# Altium PCB PCB1.PcbDoc
Units mil, origin at the board's own origin, x right, y up, seen from the top; angles counter-clockwise.
Board outline 6000 x 4000 mil, 2 copper layers (Top Layer, Bottom Layer); 25 components, 10 nets, 66 pads, 0 vias.
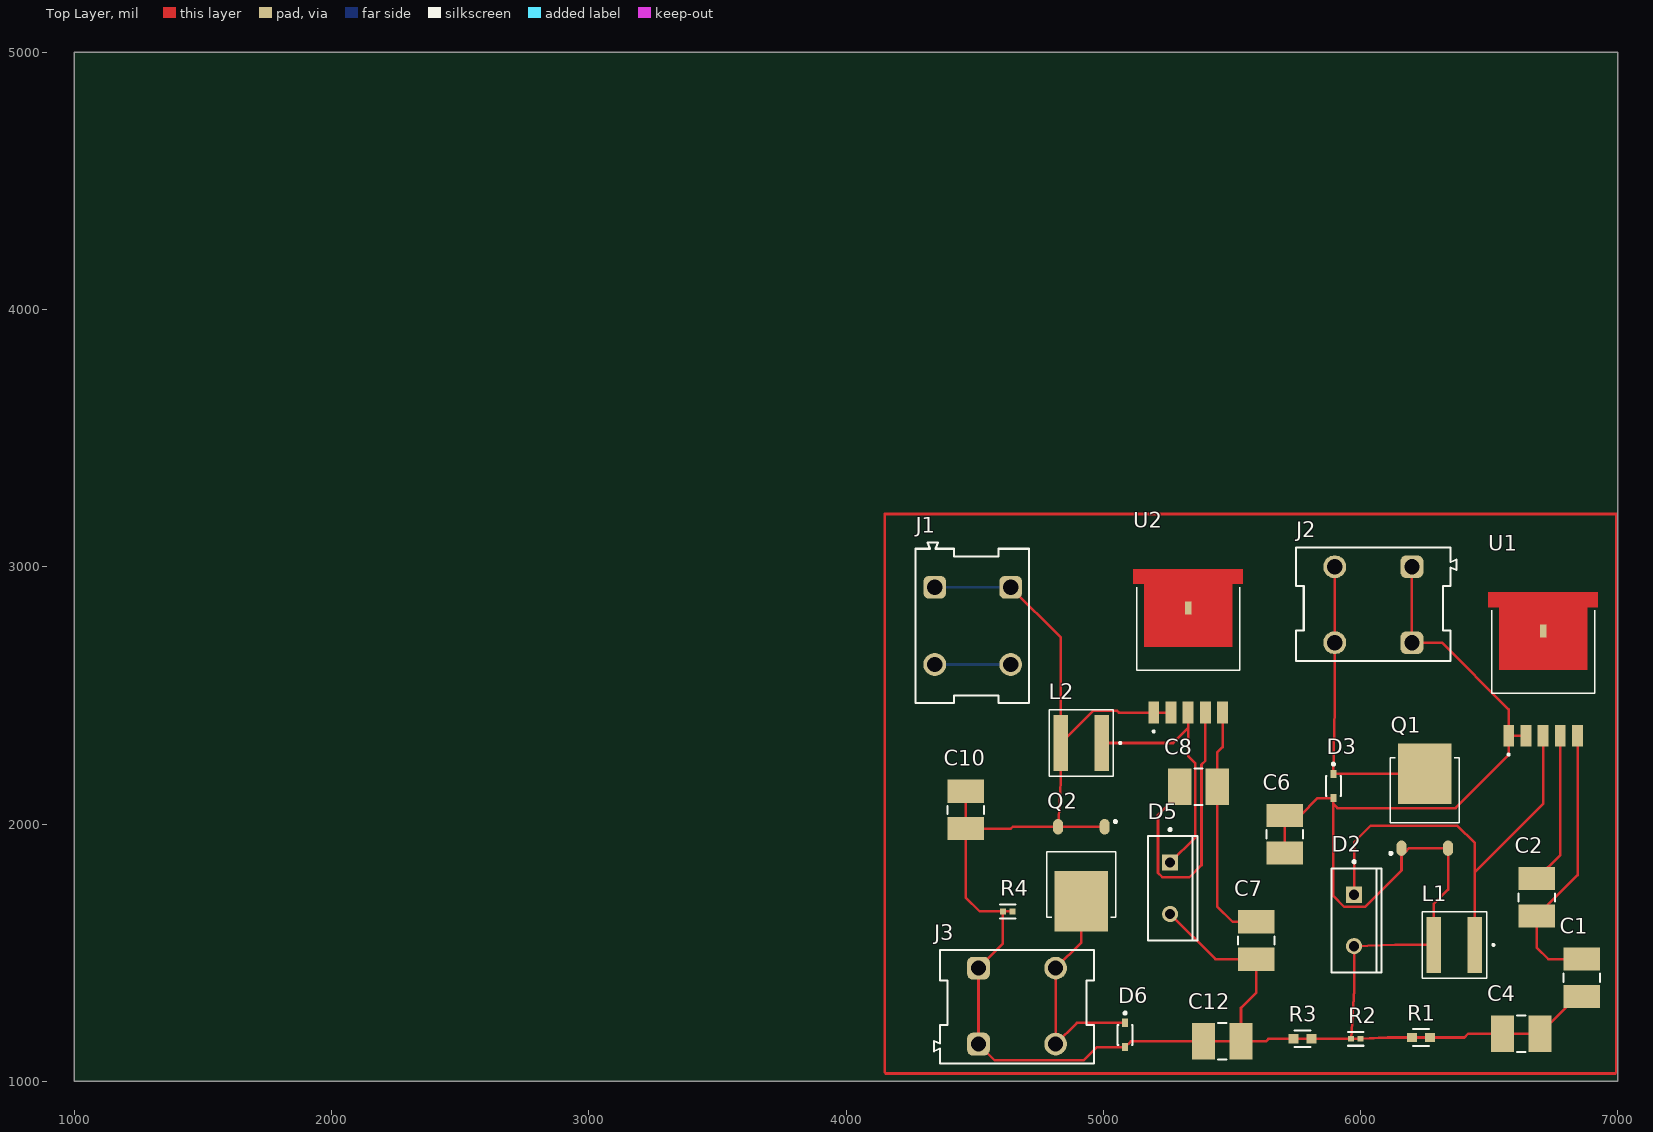
[diagram p0: Top Layer view]
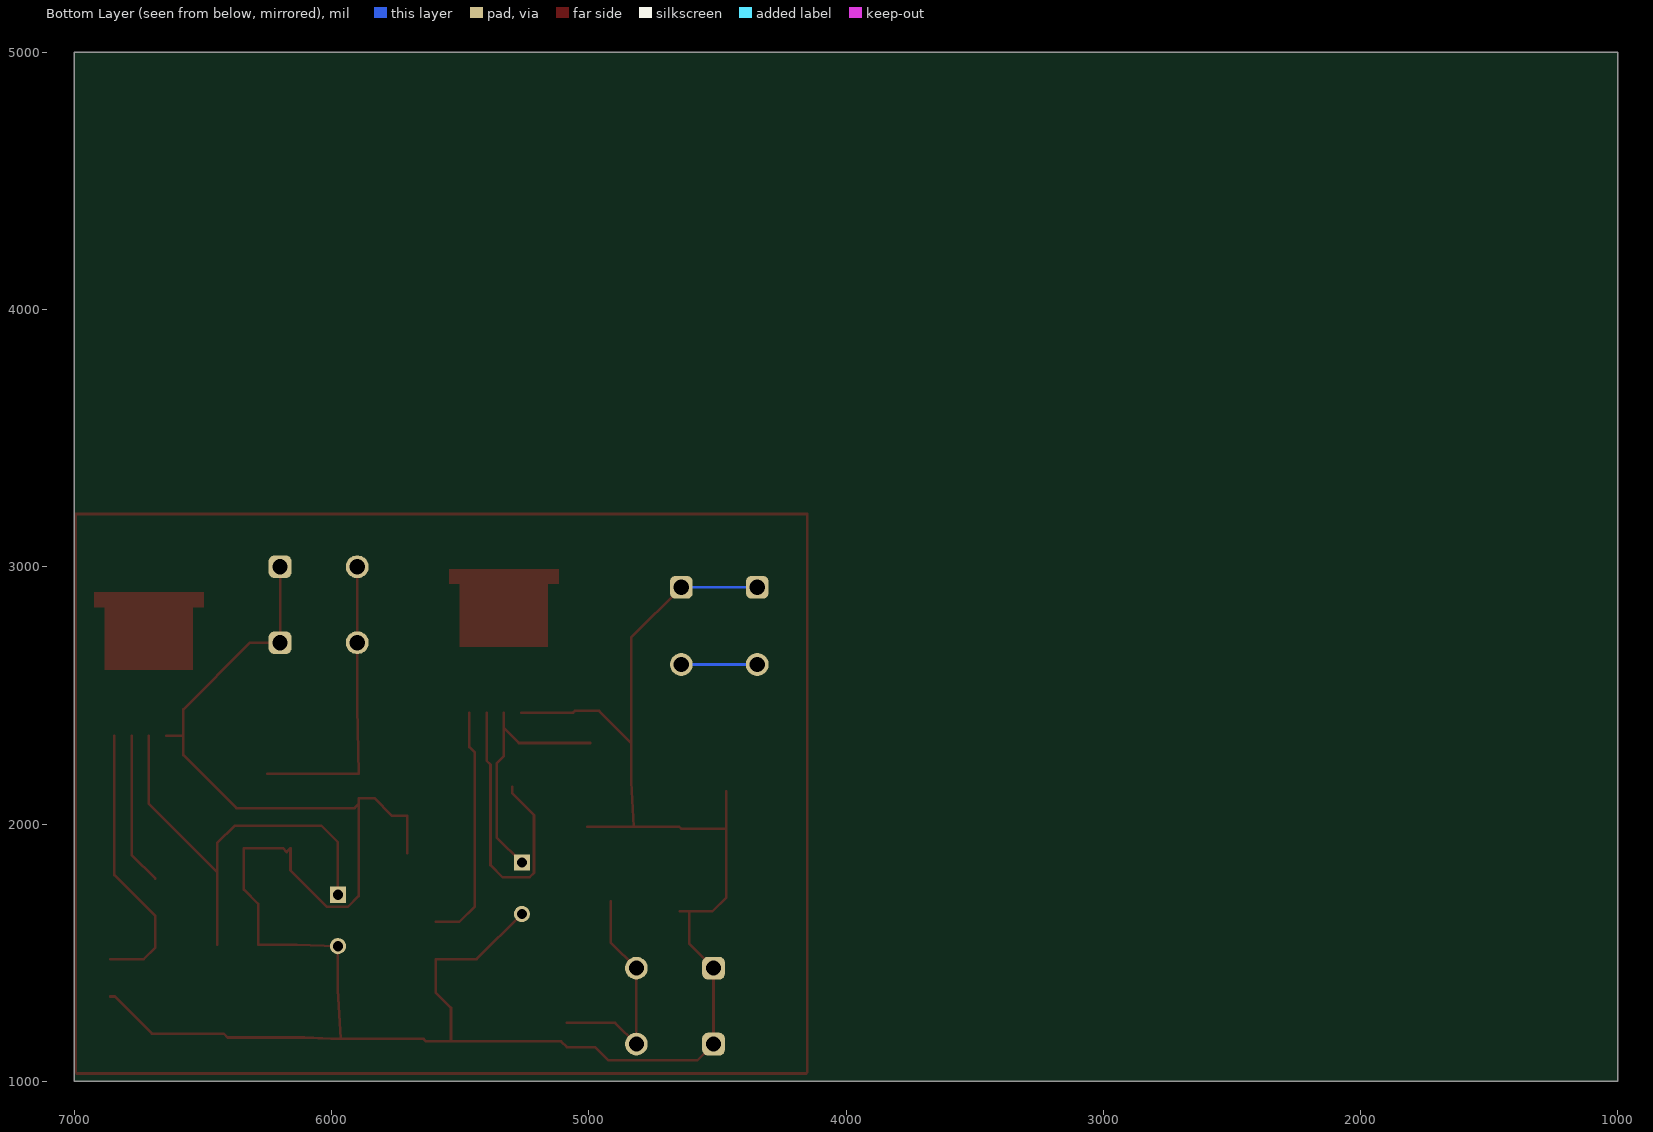
[diagram p1: Bottom Layer view, seen from below]
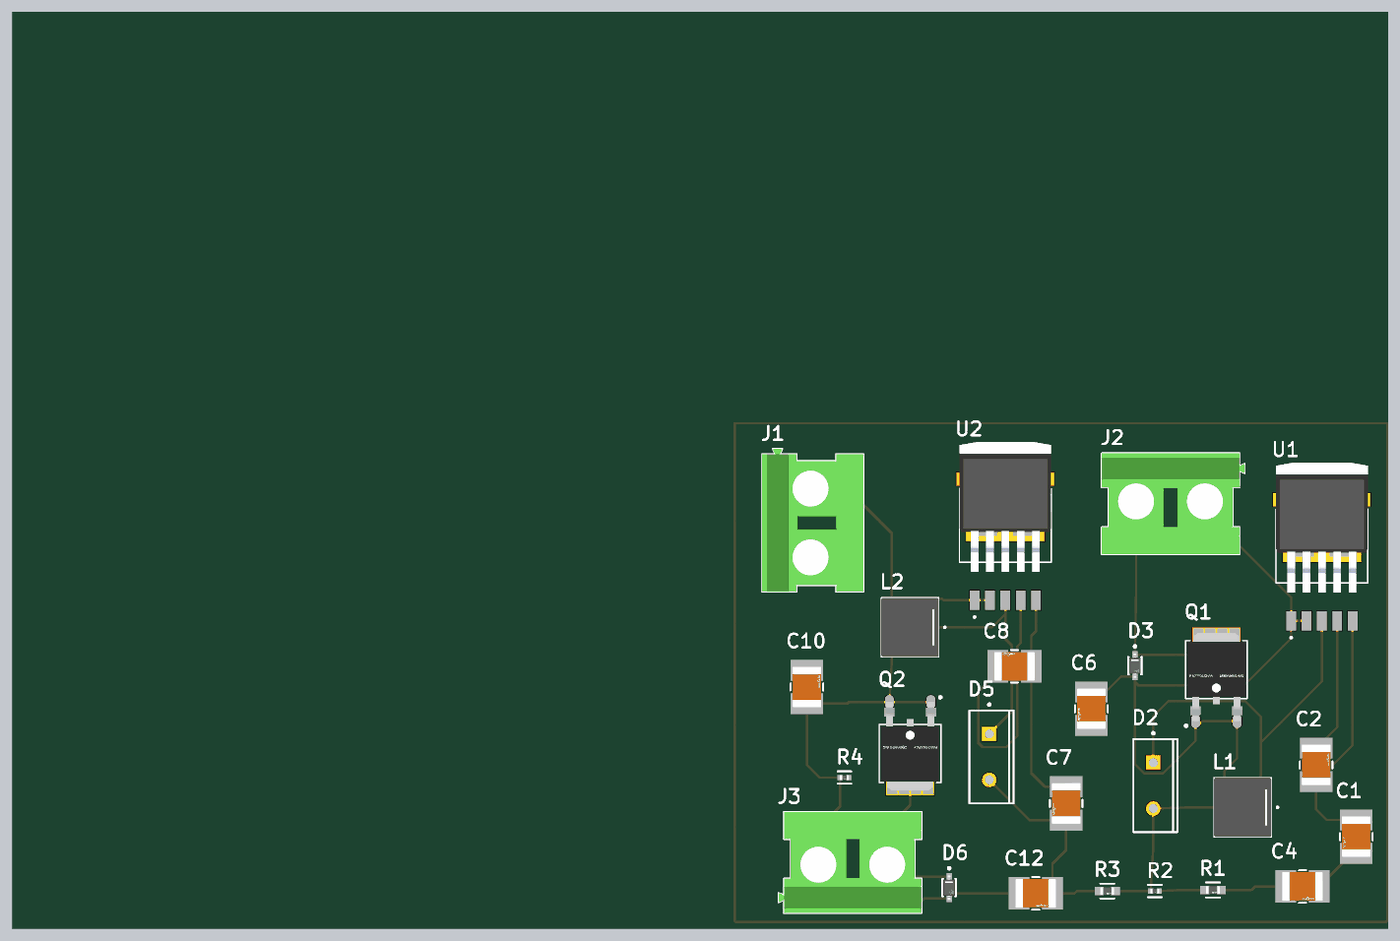
[diagram p2: 3D render of the assembled board from above, using the file's embedded part models]

## Layer stack, top to bottom
Top Solder: solder mask 0.4, Solder Resist, Dk 3.5
Top Layer: signal copper 1.4
Dielectric 1: dielectric 12.6, FR-4, Dk 4.8
Bottom Layer: signal copper 1.4
Bottom Solder: solder mask 0.4, Solder Resist, Dk 3.5

## Board outline
1000,1000 7000,1000 7000,5000 1000,5000

## Design rules (kind name [scope] priority, off if disabled: settings)
Clearance [All] p1: gap=10 ignorepadtopadclearanceinfootprint=FALSE
PolygonConnect [All] p1: connectstyle=Relief reliefconductorwidth=10 reliefentries=4 polygonreliefangle="90 Angle" airgapwidth=10
RoutingVias [All] p1: holewidth=28 width=50 viastyle="Through Hole" minholewidth=28 minwidth=50 maxholewidth=28 maxwidth=50
SolderMaskExpansion [All] p1: expansion=4 istentingtop=FALSE
SupplyNets "Schematic Supply Nets" [InNet('-12v')] p1: voltage=0.000
Width [All] p1: maxlimit=80 minlimit=10 preferedwidth=10 minimp=50.000000 maximp=50.000000 favimp=50.000000
30 further rules are at their usual default settings.

## Components (designator, comment, footprint, x,y, rotation, side; value= is the part's Value field where it differs from the comment)
C1 "220uf" FP-GRM43D-0_4-IPC_A 6860,1402.15 r270 top value=GRM43DR72J104KW01L
C2 "100uf" FP-GRM43D-0_4-IPC_A 6685,1715 r90 top value=GRM43DR72J104KW01L
C4 "capacitor" FP-GRM43D-0_4-IPC_A 6625,1185 r0 top value=GRM43DR72J104KW01L
C6 "capacitor" FP-GRM43D-0_4-IPC_A 5705,1960 r270 top value=GRM43DR72J104KW01L
C7 "220uf" FP-GRM43D-0_4-IPC_A 5595,1547.15 r270 top value=GRM43DR72J104KW01L
C8 "100uf" FP-GRM43D-0_4-IPC_A 5370,2145 r180 top value=GRM43DR72J104KW01L
C10 "capacitor" FP-GRM43D-0_4-IPC_A 4465,2055 r90 top value=GRM43DR72J104KW01L
C12 "capacitor" FP-GRM43D-0_4-IPC_A 5462.85,1155 r0 top value=GRM43DR72J104KW01L
D2 "schottky" ONSC-TO-220-2-221B-04_E 5975,1625 r0 top value=MBR1045G
D3 "BZX384C36-G3-08" FP-S8-V-3910_02-001-MFG 5895,2147.76 r270 top
D5 "schottky" ONSC-TO-220-2-221B-04_E 5260,1750 r0 top value=MBR1045G
D6 "BZX384C36-G3-08" FP-S8-V-3910_02-001-MFG 5085,1180 r270 top
J1 "691254410002" 691254410002 4490.67,2770 r270 top
J2 "691254410002" 691254410002 6050,2854.33 r180 top
J3 "691254410002" 691254410002 4665,1290 r0 top
L1 "inductor" IND_XAL6060-223MEC 6365,1530 r180 top value=XAL6060-223MEC
L2 "inductor" IND_XAL6060-223MEC 4914.53,2315 r180 top value=XAL6060-223MEC
Q1 "NP20P06SLG-E1-AY" DPAK230P1010X240-3_PRSS0004ZV-A_N 6250,2095 r90 top
Q2 "NP20P06SLG-E1-AY" DPAK230P1010X240-3_PRSS0004ZV-A_N 4915,1800.39 r270 top
R1 "18.4k" FP-RN731J-MFG 6235.43,1170 r0 top value=10KΩ
R2 "3.3k" FP-RN73R1E-IPC_B 5981.73,1165 r0 top value=RN73R1ETTP3301F25
R3 "10k" FP-RN731J-MFG 5774.57,1165 r0 top value=10KΩ
R4 "3.3k" FP-RN73R1E-IPC_B 4628.27,1660 r0 top value=RN73R1ETTP3301F25
U1 "XL4015" CONV_XL4015 6710,2750 r90 top
U2 "XL4015" CONV_XL4015 5330,2840 r90 top

## Footprints (in the part's own frame and the unit in brackets; to place one, negate y for a bottom-side part, rotate by r counter-clockwise, add the part's x,y. Pads: shape width x height; smd on the part's side, far side on the other; paste and mask are expansions set on the pad)
691254410002 [mm] "Serie 2544 - 7.62 mm _ 2 pins"
  rrect50% 2.25x2.25 hole 1.5: 1(-3.81,3.8) 1(-3.81,-3.7)
  round 2.25 hole 1.5: 2(3.81,3.8) 2(3.81,-3.7)
  silkscreen extent -8.22,-5.6 7.62,5.6, body extent -8.22,-5.6 7.62,5.6, height 18.05
CONV_XL4015 [mm]
  rect 2.16x1.07 smd: 1(-10.335,3.4) 2(-10.335,1.7) 3(-10.335,0) 4(-10.335,-1.7) 5(-10.335,-3.4)
  rect 1.27x0.635 smd paste-2 mask+0: 3.1(0,0)
  Top Layer region: 3.835,-5.4 2.365,-5.4 2.365,-4.35 -3.835,-4.35 -3.835,4.35 2.365,4.35 2.365,5.4 3.835,5.4
  silkscreen extent -12.3,-5.08 2.05,5.08, body extent -7.17,-5.08 7.17,5.08, height 4.7
DPAK230P1010X240-3_PRSS0004ZV-A_N [mm] "D-PAK, 3-Pads, Body 6.10x6.50mm (max), IPC Medium Density"
  rrect100% 1.525x1 smd: 1(-4.8,2.3) 3(-4.8,-2.3)
  rect 6x5.3 smd paste-3: 4(2.55,0)
  silkscreen extent -5.44,-3.41 4.11,3.47, body extent -4.81,-3.25 4.99,3.25, height 2.65
FP-GRM43D-0_4-IPC_A [mil]
  rect 90.64x141.9 smd paste+0 mask+0: 1(-72.85,0) 2(72.85,0)
  silkscreen extent -16,-71 16,71, body extent -138,-91 138,91, height 10
FP-RN73R1E-IPC_B [mil]
  rect 23.14x22.54 smd paste+0 mask+0: 1(-18.27,0) 2(18.27,0)
  silkscreen extent -30,-27 30,27, body extent -36,-17 36,17, height 10
FP-RN731J-MFG [mm]
  rect 1x0.9 smd paste+0 mask+0: 1(-0.9,0) 2(0.9,0)
  silkscreen extent -0.77,-0.82 0.77,0.82, body extent -1.5,-0.55 1.5,0.55, height 0.25
FP-S8-V-3910_02-001-MFG [mm]
  rect 0.8x0.6 smd paste+0 mask+0: 1(-1.2,0) 2(1.2,0)
  silkscreen extent -2.27,-0.75 0.98,0.75, body extent -1.7,-0.85 1.7,0.85, height 0.25
IND_XAL6060-223MEC [mm]
  rect 1.43x5.5 smd: 1(-2.02,0) 2(2.02,0)
  silkscreen extent -3.95,-3.28 3.18,3.28, body extent -3.18,-3.28 3.18,3.28, height 6.1
ONSC-TO-220-2-221B-04_E [mm] "FM, 2-Leads, Body 10.3x4.85mm, Pitch 5.08mm"
  rect 1.6x1.6 hole 1: 1(0,2.54)
  round 1.6 hole 1: 3(0,-2.54)
  silkscreen extent -2.2,-5.15 2.69,5.92, body extent -2.18,-5.15 2.67,5.15, height 19.05

## Part data
C1 C2 C4 C6 C7 C8 C10 C12: library part CMP-06035-043619-1, "Chip Multilayer Ceramic Capacitors for General Purpose, 1812, 0.10uF, X7R, 15%, 10%, 630V", Capacitance=100nF, Case Code (Imperial)=1812, Case Code (Metric)=4532, Dielectric=X7R, Max Operating Temperature=125°C, Min Operating Temperature=-55°C, Package Quantity=1, Tolerance=10%, Voltage=630V, Case/Package=1812, Depth=3.2mm, Height=2mm, Lead Free="Lead Free", Length=4.5mm, Mount="Surface Mount", Number of Pins=2, Packaging="Tape and Reel", Radiation Hardening=No, REACH SVHC="No SVHC", Termination=SMD/SMT, Thickness=0.087inch, Voltage Rating=630V, Voltage Rating (DC)=630V, Width=3.2mm
D2 D5: library part CMP-1055-00610-1, "SWITCHMODE(TM) Power Rectifier, 2-Pin TO-220, Pb-Free, Tube", Manufacturer="On Semiconductor", PartNumber=MBR1045G, ComponentLink1Description="Manufacturer URL", ComponentLink1URL=http://www.onsemi.com/, ComponentLink2Description=Datasheet, ComponentLink2URL=http://www.onsemi.cn/pub_link/Collateral/MBR1035-D.PDF, ComponentLink3Description="Package Specification", ComponentLink3URL=http://www.onsemi.com/pub_link/Collateral/BYW29-D.PDF, Configuration=Single, DatasheetVersion="Rev. 8", IFSM Max (A)=150, Mounting Technology="Through Hole", PackageDescription="2-Pin Flange Mount, Vertical Straight Lead, Body 9.97 x 4.44 mm, Pitch 5.08 mm", PackageReference=TO-220-2-221B-04_E, PackageVersion="Rev. E", Packing=Tube, RoHS=TRUE
D3 D6: library part CMP-00030-30650272-1, "BZX384C36-G3-08 Zener Diode Sod3235%, 36V, 0.2W", Case/Package=SOD-323-2, Max Junction Temperature (Tj)=150°C, Max Power Dissipation=200mW, Max Reverse Leakage Current=50nA, Min Operating Temperature=-55°C, Tolerance=5%, Zener Voltage=36V, Element Configuration=Single, Height=1.15mm, Impedance=90Ω, Max Operating Temperature=150°C, Mount="Surface Mount", NexarPartId=30650272, Power Dissipation=200mW, RoHS=Compliant, Voltage Tolerance=5%, Weight=3.997283mg
J1 J2 J3: library part CMP-1502-02748-2, NexarPartId=105950827
L1 L2: library part XAL6060-223MEC, "22 ÂµH Shielded Molded Inductor 5 A 60.63mOhm Max Nonstandard", Package=None, Check_prices=https://www.snapeda.com/parts/XAL6060-223MEC/Coilcraft/view-part/?ref=eda, MF=Coilcraft, MP=XAL6060-223MEC, SnapEDA_Link=https://www.snapeda.com/parts/XAL6060-223MEC/Coilcraft/view-part/?ref=snap
Q1 Q2: library part CMP-00572-18642678-1, "Mosfet, P -Ch, 60V, 20A, To-252 Rohs Compliant: Yes", Case/Package=TO-252, Continuous Drain Current (ID)=-20A, Drain to Source Voltage (Vdss)=-60V, Gate to Source Voltage (Vgs)=-20V, Input Capacitance=1.65nF, Manufacturer Lifecycle Status=ACTIVE, Max Junction Temperature (Tj)=175°C, Max Power Dissipation=1.2W, Min Operating Temperature=-55°C, China RoHS=Compliant, ComponentLink1Description="Manufacturer's Website", ComponentLink1URL=http://www.renesas.com, ComponentLink2Description="Datasheet URL", ComponentLink2URL=https://octopart.com/cad-content/api/get-model-datasheet/15189/18642678, ComponentLink3Description="Manufacturer's Package Drawing", ComponentLink3URL=https://www.renesas.com/en/document/psc/package-drawing-mp-3zk-3pin-prss0004zv, Export Control Classification Number (ECCN) Code=EAR99, Fall Time=80ns, Height=2.4mm, HelpURL=https://octopart.com/cad-content/api/get-model-datasheet/15189/18642678, Length=6mm, Lifecycle Status=Production, Max Operating Temperature=175°C, Mount="Surface Mount", Number of Elements=1, Number of Pins=3, Packaging="Tape and Reel", Power Dissipation=1.2W, Radiation Hardening=No, Rds On Max=48mΩ, Rise Time=8ns, RoHS=Compliant, Turn-Off Delay Time=160ns, Turn-On Delay Time=8ns, Width=6mm
R1 R3: library part CMP-03211-006130-1, "Thin Film Resistors RN 0603 10KΩ 0.1% 10ppm/°C", Manufacturer="TE Connectivity", Manufacturer Part Number=RN73C1J10KB, Package=RN731J, Power Rating=0.063W, Resistance=10KΩ, Temperature="-55°C to +155°C", Temperature Coefficient=10ppm/°C, Temperature Range High=+155°C, Temperature Range Low=-55°C, Tolerance=0.1%, Voltage Rating=50V, Automotive=No, Category=Res, ComponentLink2Description=Datasheet, ComponentLink2URL=https://www.te.com/commerce/DocumentDelivery/DDEController?Action=showdoc&DocId=Data+Sheet%7F1773270%7FP%7Fpdf%7FEnglish%7FENG_DS_1773270_P.pdf%7F9-1614352-9, Composition="Thin Film", Device Class L1="Passive Components", Device Class L2=Resistors, Device Class L3="Chip SMD Resistors", Height=0.55mm, Ipc Land Pattern Name=RESC15580X45, Lead Free=Yes, Octopart=https://octopart.com/rn73c1j10kb-te+connectivity-47108040, octopart_url=https://octopart.com/rn73c1j10kb-te+connectivity-47108040, RoHS=TRUE, Series=RN73
R2 R4: library part CMP-04015-026447-1, "3.3kΩ ±1% 0.063W, 1/16W Chip Resistor 0402 (1005 Metric) Moisture Resistant Thin Film"
U1 U2: "5A 180KHz 36V Buck DC to DC Converter", Package=None, Check_prices=https://www.snapeda.com/parts/XL4015/XLSEMI/view-part/?ref=eda, MF=XLSEMI, MP=XL4015, SnapEDA_Link=https://www.snapeda.com/parts/XL4015/XLSEMI/view-part/?ref=snap

## Nets (pads, with @x,y where several pads share a name; then routed paths per layer and width w, separated by ;. In a path a pad name is that pad's centre, name@x,y a point inside that pad or via, vN(x,y) a via of type N, cw(c..) or ccw(c..) an arc to the next point about the centre after c; other vN are vias at no path point)
+12v: J1.2 | length 295.3
  Bottom Layer w10: J1.2@4345,2620 J1.2@4640.28,2620
-12v: C1.2 C4.1 C4.2 C6.1 C6.2 C7.2 C10.1 C10.2 C12.1 C12.2 D2.3 D3.2 D5.3 D6.2 J1.1 J2.1 J3.1 L1.2 L2.2 Q1.1 Q1.3 Q2.1 Q2.3 R1.1 R1.2 R2.1 R2.2 R3.1 R3.2 R4.1 R4.2 U1.1 U1.2 U2.1 U2.2 | length 10959.4
  Top Layer w10: C10.2 C10.1 ; J1.1@4640.28,2920 4835,2725.28 L2.2 ; R4.2 R4.1 ; Q2.1 Q2.3 ; D5.3 5435.7,1474.3 C7.2 5595,1344.3 5535.7,1285 C12.2 ; U2.2 U2.1 5196.14,2433 5061,2433 5054,2440 4960,2440 L2.2 ; C6.2 C6.1 5766,2032.85 5833.66,2100.51 D3.2 5895,2077 ; J2.1@6200,3000 6200,2704.72 6317.42,2704.72 6576.14,2446 U1.1 ; U1.2 U1.1 ; C1.2 6842.15,1329.3 C4.2 C4.1 6419,1185 6404,1170 R1.2 R1.1 6105,1170 R2.2 R2.1 ; C10.1 4465,1715 4520,1660 R4.1 ; C10.1 4641,1982.15 4648.22,1989.37 Q2.3 ; R4.1 4610,1534.61 4515,1439.61 4515,1144.33 4578.33,1081 4924,1081 4975.76,1132.76 D6.2 5107.24,1155 C12.1 C12.2 ; Q2.3 4835,2163.55 L2.2 ; C12.2 5632,1155 5642,1165 R3.1 R3.2 R2.1 ; 5895,2077 5895,1720 5937,1678 6017.45,1678 6159.45,1820 Q1.1 6174.28,1891.19 6189.11,1906.02 Q1.3 6340.55,1745.08 6285.47,1690 L1.2 6135,1530 D2.3 5975,1356.54 R2.1 ; 5895,2077 5910,2062 6370,2062 6576.14,2268.14 U1.1
  Bottom Layer w10: J1.1@4345,2920 J1.1@4640.28,2920
NetC1_1: C1.1 C2.1 U1.5 | length 1082.6
  Top Layer w10: U1.5 6843.86,1801.01 C2.1 6685,1520 6730,1475 C1.1
NetC2_2: C2.2 U1.4 | length 593.3
  Top Layer w10: C2.2 6776.93,1879.78 U1.4
NetC7_1: C7.1 C8.1 U2.5 | length 938.8
  Top Layer w10: U2.5 5463.86,2299.01 5442.85,2278 C8.1 5442.85,1680 5502.85,1620 C7.1
NetC8_2: C8.2 U2.4 | length 1164.7
  Top Layer w10: C8.2 5297.15,2119 5213,2034.85 5213,1810 5230,1793 5335,1793 5382,1840 5382,2231 5396.93,2245.93 U2.4
NetD2_1: D2.1 L1.1 U1.3 | length 1764.9
  Top Layer w10: D2.1 5975,1929 6040,1994 6376,1994 6444.53,1925.47 6444.53,1812.53 ; L1.1 6444.53,1812.53 ; U1.3 6710,2078 6444.53,1812.53
NetD5_1: D5.1 L2.1 U2.3 | length 995.3
  Top Layer w10: L2.1 5272,2315 5330,2373 ; D5.1 5358,1948 5358,2236 5330,2264 5330,2373 ; U2.3 5330,2373
out_5v: D6.1 J3.2 Q2.4 | length 901.4
  Top Layer w10: Q2.4 4915,1539.61 4815,1439.61 4815,1144.33 4897.91,1227.24 D6.1
out_8.4v: D3.1 J2.2 Q1.4 | length 1160.2
  Top Layer w10: J2.2@5900,3000 5900,2704.72 5900,2454 D3.1 6072,2195 6072.39,2195.39 Q1.4
pads on no net: U1.3.1 U2.3.1
copper on no net: | length 10034.1
  Top Layer w10: 4150,1035 4155,1030 6990,1030 6995,1035 6995,3205 4150,3205 4150,1035